# EAGLE board Skematik1 (EAGLE 9.6.2)
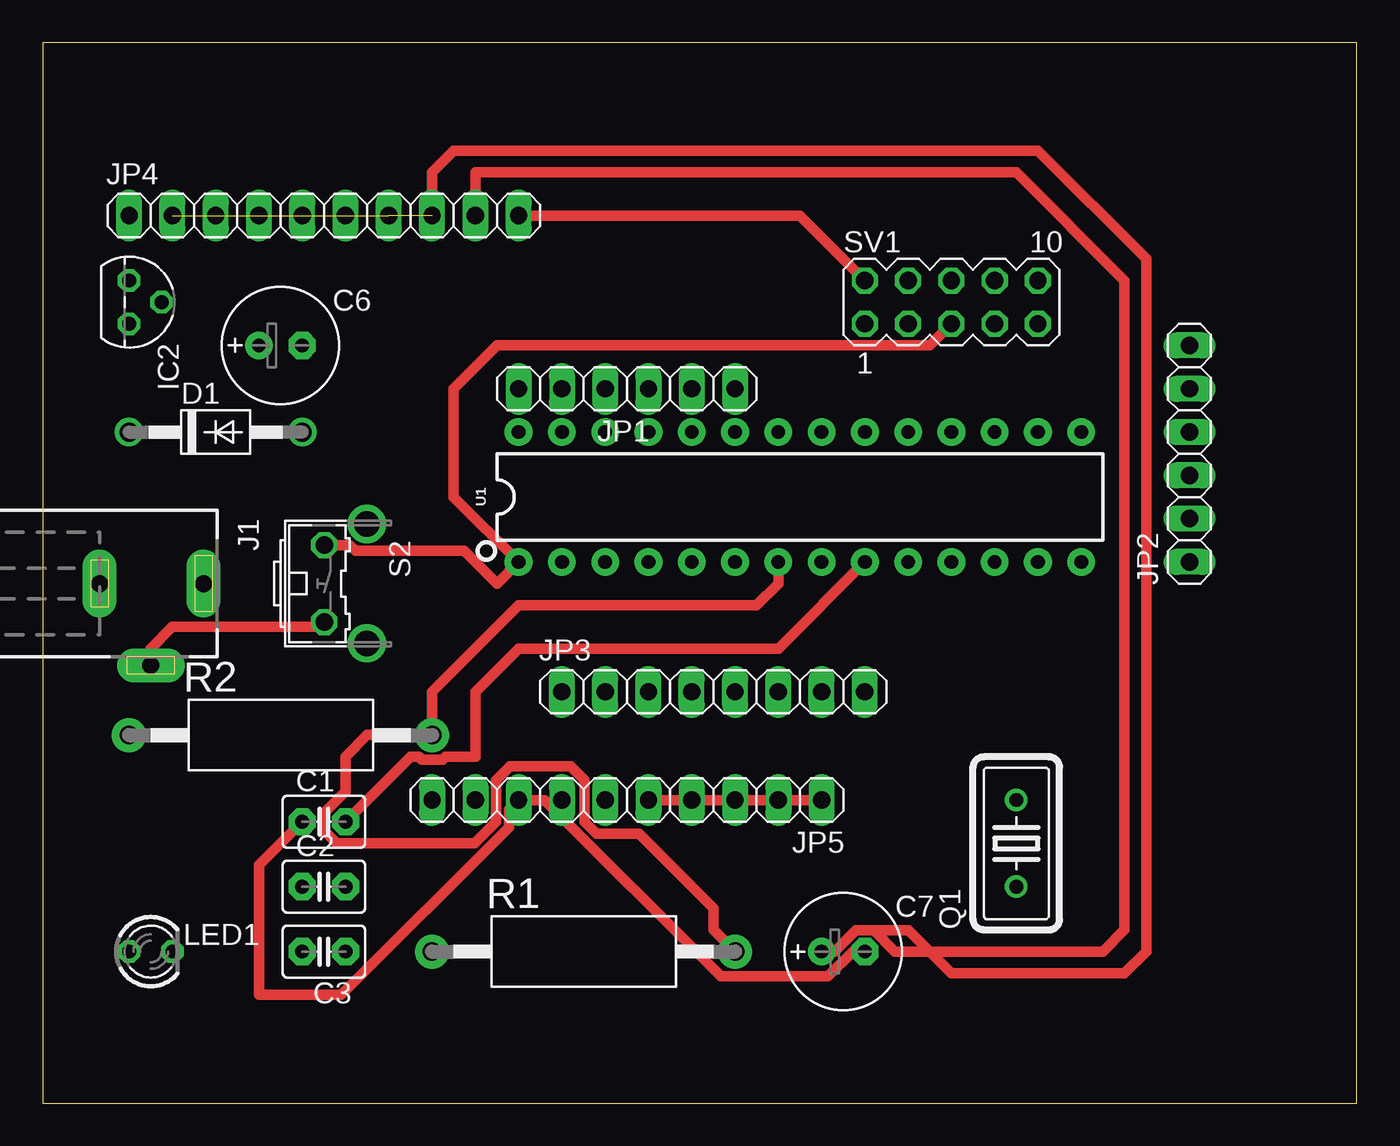
[diagram p0: board, top side]
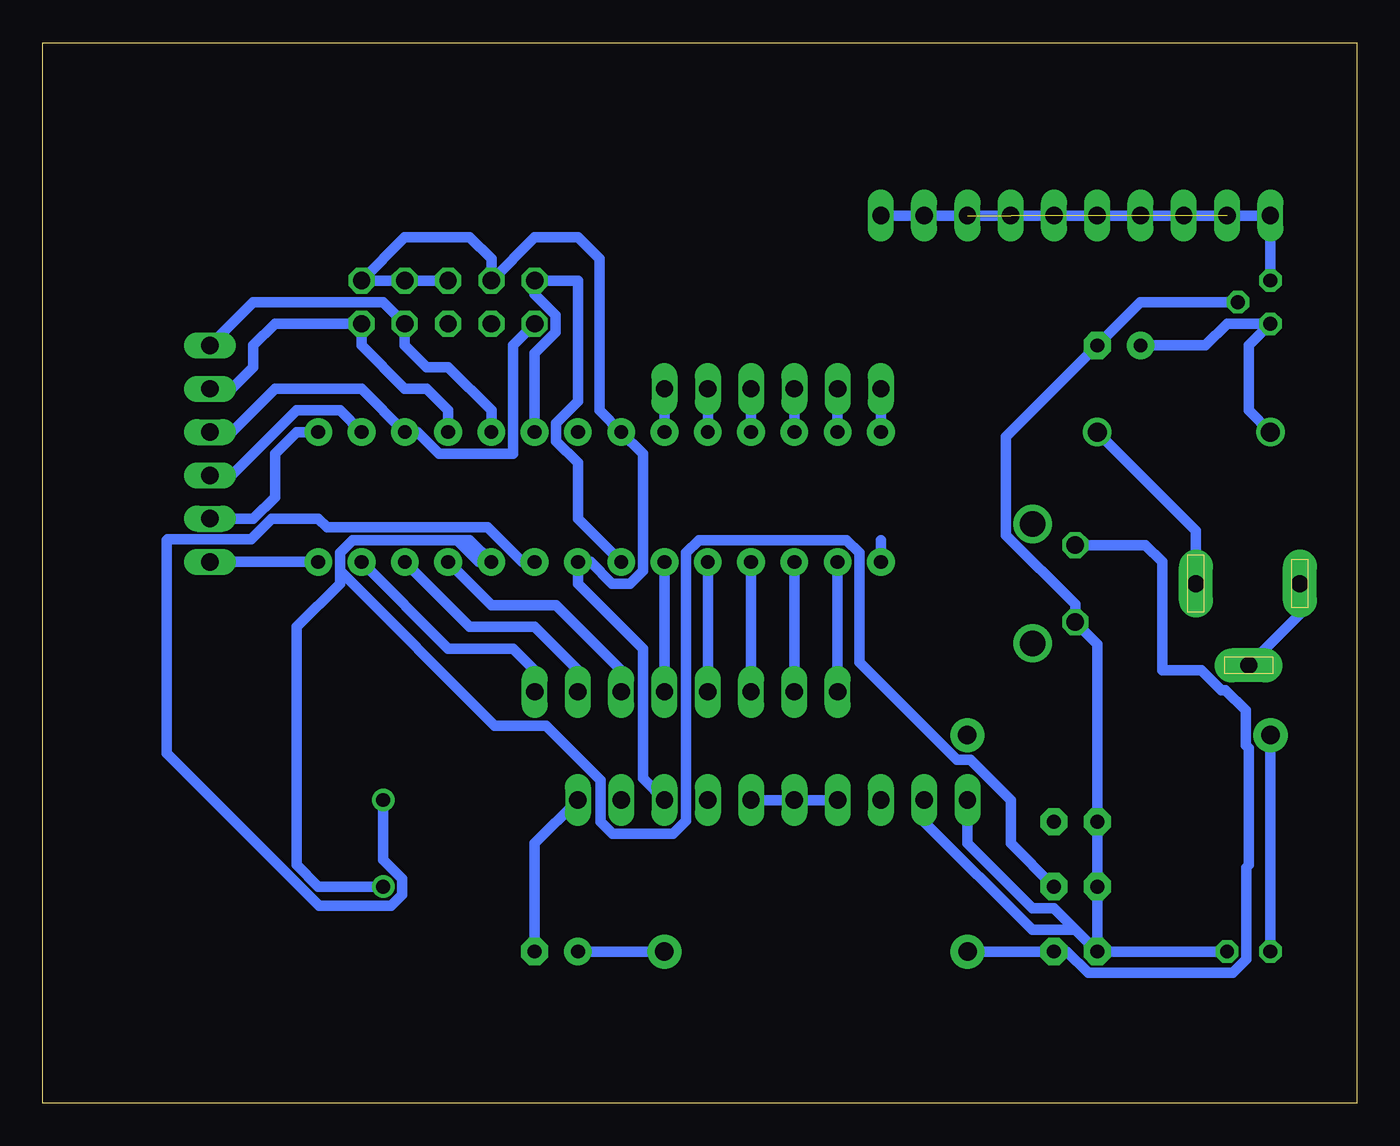
[diagram p1: board, bottom side, seen from below]

Size 77.14 x 62.22 mm. Coordinates in mm from the lower left corner, seen from the top.
Outline: 0,0 77.14,0 77.14,62.22 0,62.22 0,0
Copper layers (1*16): Top 0.035mm / dielectric 1.5mm / Bottom 0.035mm
Design rules "default": minimum track width 6mil, minimum drill 0.35mm, track to track 6mil, track to pad 6mil, pad to pad 6mil, via to via 6mil, smd to smd 6mil, copper to edge 40mil, drill to drill 6mil, minimum pad ring 10mil, minimum via ring 8mil, stop-mask expansion 4mil, vias tented up to drill 0mil, thermal gap 10mil

## Footprints (pad centres in the part's own frame; a part is rotated, then mirrored left to right if it is on the bottom)
C2.5-3 = drill 0.813 pad 1.6 octagon: 1 -1.27,0; 2 1.27,0
E2,5-7 = drill 0.813 pad 1.6: + -1.27,0 | drill 0.813 pad 1.6 octagon: - 1.27,0
DO41-10 = drill 1.118: A 5.08,0; C -5.08,0
TO92 = drill 0.813 octagon: 1 -1.27,0; 2 0,1.905; 3 1.27,0
DCJ0202 = drill 1 pad 2 long: 1 0,3.1; 2 4.8,0; 3 0,-3
1X06 = drill 1.016 long: 1 -6.35,0; 2 -3.81,0; 3 -1.27,0; 4 1.27,0; 5 3.81,0; 6 6.35,0
1X08 = drill 1.016 long: 1 -8.89,0; 2 -6.35,0; 3 -3.81,0; 4 -1.27,0; 5 1.27,0; 6 3.81,0; 7 6.35,0; 8 8.89,0
1X10 = drill 1.016 long: 1 -11.43,0; 2 -8.89,0; 3 -6.35,0; 4 -3.81,0; 5 -1.27,0; 6 1.27,0; 7 3.81,0; 8 6.35,0; 9 8.89,0; 10 11.43,0
LED3MM = drill 0.813 octagon: A -1.27,0; K 1.27,0
HC18U-V = drill 0.813: 1 -2.54,0; 2 2.54,0
AC01 = drill 1.1 pad 2: 1 -8.9,0; 2 8.9,0
B3F-31XX = drill 1.016 octagon: 1 -2.261,-1.245; 2 2.261,-1.245 | drill 1.499 pad 2.159: 3 -3.505,1.245; 4 3.505,1.245
MA05-2 = drill 1.016 octagon: 1 -5.08,-1.27; 2 -5.08,1.27; 3 -2.54,-1.27; 4 -2.54,1.27; 5 0,-1.27; 6 0,1.27; 7 2.54,-1.27; 8 2.54,1.27; 9 5.08,-1.27; 10 5.08,1.27
DIP28 = drill 0.813 pad 1.626: 1 -16.51,-3.81; 2 -13.97,-3.81; 3 -11.43,-3.81; 4 -8.89,-3.81; 5 -6.35,-3.81; 6 -3.81,-3.81; 7 -1.27,-3.81; 8 1.27,-3.81; 9 3.81,-3.81; 10 6.35,-3.81; 11 8.89,-3.81; 12 11.43,-3.81; 13 13.97,-3.81; 14 16.51,-3.81; 15 16.51,3.81; 16 13.97,3.81; 17 11.43,3.81; 18 8.89,3.81; 19 6.35,3.81; 20 3.81,3.81; 21 1.27,3.81; 22 -1.27,3.81; 23 -3.81,3.81; 24 -6.35,3.81; 25 -8.89,3.81; 26 -11.43,3.81; 27 -13.97,3.81; 28 -16.51,3.81

## Placement (x,y rotation side)
C1  [C2.5-3]  16.51,16.51 0 top
C2  [C2.5-3]  16.51,12.7 0 top
C3  [C2.5-3]  16.51,8.89 180 top
C6  [E2,5-7]  13.97,44.45 0 top
C7  [E2,5-7]  46.99,8.89 0 top
D1  1N4004  [DO41-10]  10.16,39.37 0 top
IC2  78L05Z  [TO92]  5.08,46.99 270 top
J1  DCJ0202  [DCJ0202]  6.35,30.48 270 top
JP1  [1X06]  34.29,41.91 180 top
JP2  [1X06]  67.31,38.1 90 top
JP3  [1X08]  39.37,24.13 0 top
JP4  [1X10]  16.51,52.07 0 top
JP5  [1X10]  34.29,17.78 180 top
LED1  [LED3MM]  6.35,8.89 0 top
Q1  [HC18U-V]  57.15,15.24 90 top
R1  [AC01]  31.75,8.89 0 top
R2  [AC01]  13.97,21.59 0 top
S2  [B3F-31XX]  17.78,30.48 270 top
SV1  [MA05-2]  53.34,46.99 0 top
U1  328P  [DIP28]  44.45,35.56 0 top

## Library data of the parts
C1-C3 = capacitor-wima
C6 C7 = rcl; SPICEPREFIX: C
D1 = diode
IC2 = linear
J1 = con-jack; OC_FARNELL: unknown; OC_NEWARK: unknown
JP1-JP5 = pinhead
LED1 = led
Q1 = crystal; OC_FARNELL: unknown; OC_NEWARK: unknown
R1 R2 = resistor-power; OC_FARNELL: unknown; OC_NEWARK: unknown
S2 = switch-omron; MPN: B3F-3100; OC_FARNELL: 959704; OC_NEWARK: 36M3582
SV1 = con-lstb; OC_FARNELL: unknown; OC_NEWARK: unknown
U1 = SparkFun-IC-Microcontroller; PROD_ID: IC-09136

## Nets
GND: C1.1 C2.1 C3.2 C6.- C7.- IC2.2 J1.2 J1.3 JP5.1 JP5.2 JP5.3 JP5.4 JP5.5 JP5.6 JP5.7 JP5.8 JP5.9 JP5.10 LED1.K S2.2 SV1.4 SV1.6 SV1.8 SV1.10 U1.8 U1.22
N$1: JP1.1 U1.23
N$2: C1.2 Q1.2 U1.9
N$3: C2.2 Q1.1 U1.10
N$4: JP1.2 U1.24
N$5: JP1.3 U1.25
N$6: JP1.4 U1.26
N$7: JP1.5 U1.27
N$8: JP1.6 U1.28
N$9: JP3.1 U1.2
N$10: JP3.2 U1.3
N$11: JP3.3 U1.4
N$12: JP3.4 U1.5
N$13: JP3.5 U1.6
N$14: JP3.6 U1.11
N$15: JP3.7 U1.12
N$16: JP3.8 U1.13
N$21: D1.A J1.1
N$25: JP2.1 U1.14
N$26: JP2.2 U1.15
N$27: JP2.3 U1.16
N$28: JP2.4 SV1.1 U1.17
N$29: JP2.5 SV1.9 U1.18
N$30: JP2.6 SV1.7 U1.19
N$34: C3.1 R1.1 S2.1 SV1.5 U1.1
N$36: LED1.A R2.1
N$38: C6.+ D1.C IC2.3
VCC: C7.+ IC2.1 JP4.1 JP4.2 JP4.3 JP4.4 JP4.5 JP4.6 JP4.7 JP4.8 JP4.9 JP4.10 R1.2 R2.2 SV1.2 U1.7 U1.20

## Tracks (layer width: path | path; a pad name or v marks a point on that pad's centre or on a via)
GND
  Top 0.61: S2.2 16.26,27.94 7.62,27.94 6.35,26.67 J1.2 | C1.1 12.7,13.97 12.7,6.35 17.53,6.35 27.38,16.2 27.38,17.22 JP5.8 29.46,17.78 39.8,7.43 46.1,7.43 47.56,8.89 C7.- | JP5.1 JP5.2 JP5.3 JP5.4 JP5.5
  Bottom 0.61: SV1.6 SV1.8 SV1.10 55.88,50.8 52.07,50.8 50.8,49.53 SV1.4 48.26,50.8 45.72,50.8 44.45,49.53 44.45,40.64 U1.22 41.91,38.1 41.91,31.22 42.65,30.48 43.71,30.48 44.98,31.75 U1.8 45.72,30.48 41.91,26.67 41.91,19.05 JP5.3 | C7.- 48.26,15.24 JP5.1 | LED1.K C3.2 | C3.2 C2.1 C1.1 15.24,26.92 S2.2 16.54,29.26 20.61,33.33 20.61,39.08 C6.- 12.7,46.99 IC2.2 | C3.2 17.78,11.43 19.05,11.43 22.86,15.24 JP5.10 | C3.2 16.51,10.16 19.05,10.16 25.4,16.51 JP5.9 | J1.2 3.35,28.68 J1.3 | JP5.5 JP5.6 JP5.7
N$1
  Bottom 0.61: JP1.1 U1.23
N$2
  Top 0.61: U1.9 43.18,26.67 27.94,26.67 25.4,24.13 25.4,20.32 23.66,20.32 23.47,20.13 22.27,20.13 22.08,20.32 21.59,20.32 C1.2
  Bottom 0.61: U1.9 49,31.75 51.04,33.78 60.45,33.78 60.96,34.29 63.69,34.29 64.91,33.07 69.8,33.07 69.85,33.02 69.85,20.51 60.92,11.58 56.69,11.58 56.03,12.24 56.03,13.16 57.15,14.28 Q1.2
N$3
  Bottom 0.61: 52.81,33.02 51.54,31.75 U1.10 52.07,33.02 52.81,33.02 | 59.69,31.22 59.69,30.48 62.23,27.94 62.23,13.97 60.96,12.7 Q1.1 | C2.2 20.32,15.24 20.32,17.78 22.67,20.13 23.47,20.13 29.21,25.87 29.21,32.28 29.95,33.02 38.63,33.02 39.37,32.28 39.37,16.56 40.13,15.8 43.69,15.8 44.4,16.51 44.4,18.95 47.6,22.15 50.62,22.15 59.69,31.22 | 59.69,31.22 59.69,32.28 58.95,33.02 52.81,33.02
N$4
  Bottom 0.61: U1.24 JP1.2
N$5
  Bottom 0.61: U1.25 JP1.3
N$6
  Bottom 0.61: U1.26 JP1.4
N$7
  Bottom 0.61: U1.27 JP1.5
N$8
  Bottom 0.61: U1.28 JP1.6
N$9
  Bottom 0.61: U1.2 JP3.1
N$10
  Bottom 0.61: U1.3 JP3.2
N$11
  Bottom 0.61: U1.4 JP3.3
N$12
  Bottom 0.61: U1.5 JP3.4
N$13
  Bottom 0.61: U1.6 JP3.5
N$14
  Bottom 0.61: JP3.6 43.18,25.4 46.99,29.21 50.8,29.21 U1.11
N$15
  Bottom 0.61: JP3.7 45.72,25.4 48.26,27.94 52.07,27.94 U1.12
N$16
  Bottom 0.61: JP3.8 48.26,25.4 49.53,26.67 53.34,26.67 U1.13
N$21
  Bottom 0.61: J1.1 9.45,33.58 D1.A
N$25
  Bottom 0.61: JP2.1 U1.14
N$26
  Bottom 0.61: JP2.2 64.77,34.29 63.5,35.56 63.5,38.1 62.23,39.37 U1.15
N$27
  Bottom 0.61: JP2.3 66.04,36.83 62.23,40.64 59.69,40.64 U1.16
N$28
  Bottom 0.61: JP2.4 66.04,39.37 63.5,41.91 58.42,41.91 U1.17 55.14,39.37 53.87,38.1 49.53,38.1 49.53,44.45 SV1.1
N$29
  Bottom 0.61: JP2.5 66.04,41.91 64.77,43.18 64.77,44.45 63.5,45.72 SV1.9 58.42,44.45 55.88,41.91 54.61,41.91 53.34,40.64 U1.18
N$30
  Bottom 0.61: JP2.6 64.77,46.99 57.15,46.99 SV1.7 55.88,44.45 54.61,43.18 53.34,43.18 50.8,40.64 U1.19
N$34
  Top 0.61: SV1.5 52.07,44.45 26.67,44.45 24.13,41.91 24.13,35.56 U1.1 26.67,30.48 24.75,32.4 18.37,32.4 18.03,32.74 S2.1
  Bottom 0.61: 27.94,33.02 U1.1 | R1.1 C3.1 17.02,8.89 15.76,7.63 7.3,7.63 6.5,8.43 6.5,13.82 6.35,13.97 6.35,20.81 6.53,20.99 6.53,23.04 7.71,24.22 7.95,24.22 9.13,25.4 11.43,25.4 11.43,31.75 12.42,32.74 S2.1
N$36
  Bottom 0.61: LED1.A R2.1
N$38
  Bottom 0.61: D1.C 6.35,40.64 6.35,44.45 IC2.3 7.62,45.72 8.89,44.45 C6.+
VCC  (6 unrouted)
  Top 0.61: SV1.2 44.45,52.07 JP4.10 | R2.2 | R2.2 22.86,24.13 27.94,29.21 41.91,29.21 43.18,30.48 U1.7 | R1.2 39.37,10.17 39.37,11.43 35,15.8 32.52,15.8 31.8,16.51 31.8,18.95 30.98,19.76 27.43,19.76 26.62,18.95 26.62,16.51 25.36,15.25 17.26,15.25 16.52,15.99 16.52,17.03 17.78,18.29 17.78,20.32 19.06,21.6 R2.2 | 48.78,10.15 50.04,8.89 62.23,8.89 63.5,10.16 63.5,48.26 57.15,54.61 25.4,54.61 JP4.9 | C7.+ 46.48,8.89 47.74,10.15 48.78,10.15 | 48.78,10.15 50.81,10.15 53.34,7.62 63.5,7.62 64.77,8.89 64.77,49.53 58.42,55.88 24.13,55.88 22.86,54.61 JP4.8
  Bottom 0.61: U1.20 48.26,44 47.04,45.22 47.04,46.23 48.26,47.44 SV1.2 45.72,48.26 45.72,41.17 46.99,39.9 46.99,38.84 45.72,37.57 45.72,34.29 U1.7 | C7.+ R1.2 | JP4.10 JP4.1 IC2.1